# Altium PCB CANHub.PcbDoc
Units mm, origin at the board's own origin, x right, y up, seen from the top; angles counter-clockwise.
Board outline 91.44 x 12.83 mm, 2 copper layers (Top Layer, Bottom Layer); 16 components, 4 nets, 67 pads, 0 vias.
Unrouted connection lines stored in the file: 1.
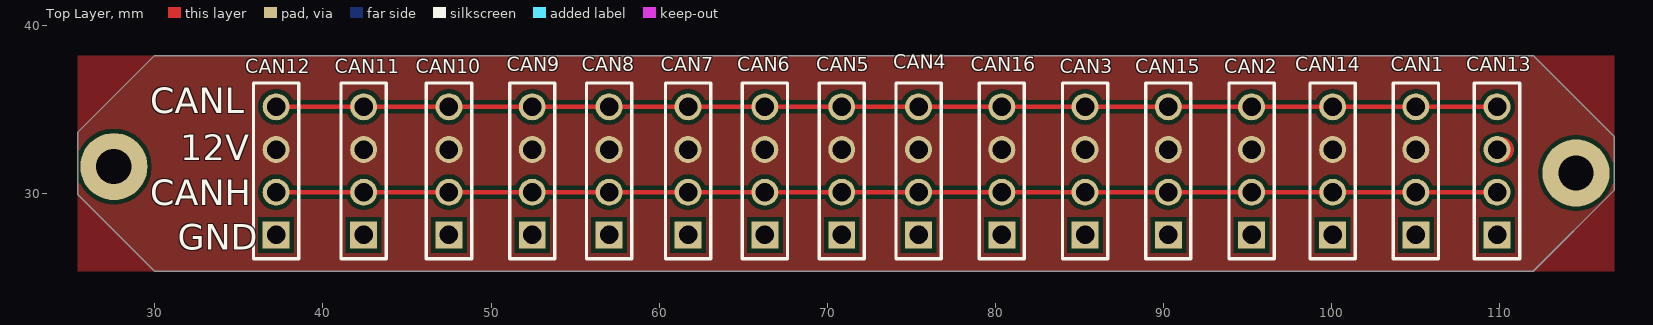
[diagram p0: Top Layer view]
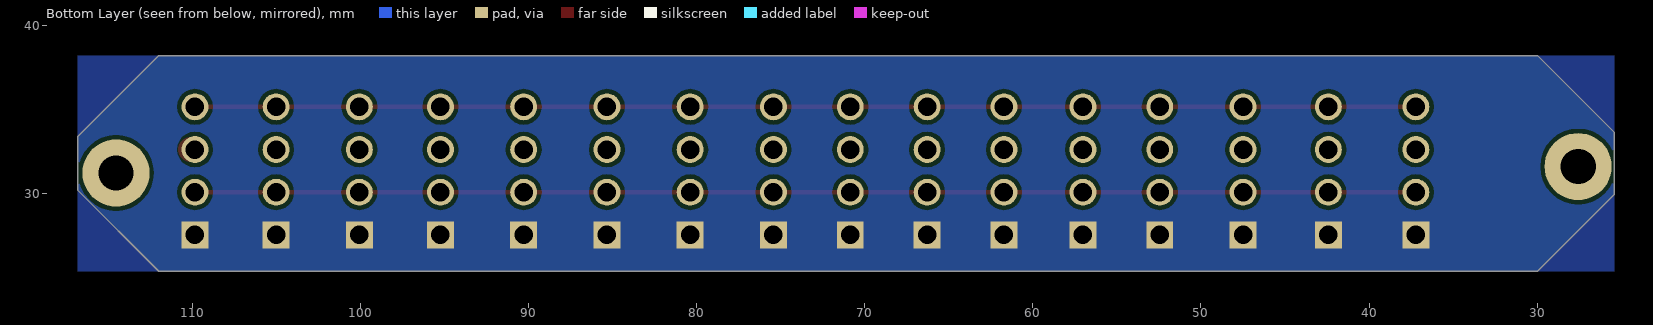
[diagram p1: Bottom Layer view, seen from below]
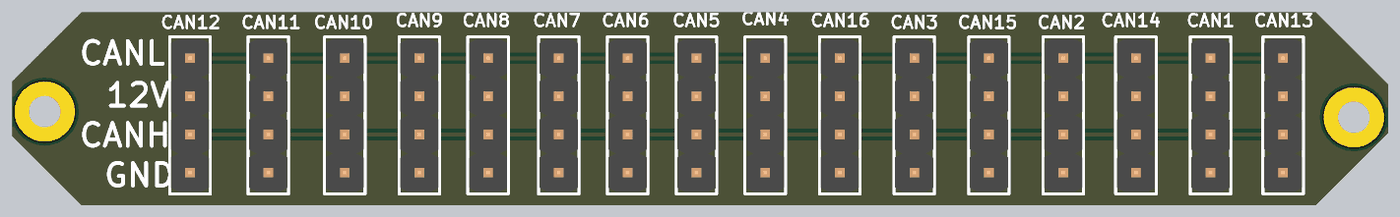
[diagram p2: 3D render of the assembled board from above, using the file's embedded part models]

## Layer stack, top to bottom
Top Solder: solder mask 0.0102, Solder Resist, Dk 3.5
Top Layer: signal copper 0.0356
Dielectric 1: dielectric 0.32, FR-4, Dk 4.8
Bottom Layer: signal copper 0.0356
Bottom Solder: solder mask 0.0102, Solder Resist, Dk 3.5

## Board outline
29.972,25.4 25.4,29.972 25.4,33.655 29.972,38.227 112.014,38.227 116.84,33.401 116.84,30.226 112.014,25.4

## Design rules (kind name [scope] priority, off if disabled: settings)
Clearance [All] p1: gap=0.254 ignorepadtopadclearanceinfootprint=FALSE except(0: Arc-Hole Track-Hole SMDPad-Hole THPad-Hole Via-Hole Fill-Hole Poly-Hole Region-Hole Text-Hole)
PolygonConnect PolygonConnect_2 [All vs IsNamedPolygon('GND_L02_P001')] p1: connectstyle=Direct reliefconductorwidth=0.254 reliefentries=4 polygonreliefangle="90 Angle" airgapwidth=0.254
PolygonConnect PolygonConnect_1 [All vs IsNamedPolygon('12V_L01_P000')] p2: connectstyle=Direct reliefconductorwidth=0.254 reliefentries=4 polygonreliefangle="90 Angle" airgapwidth=0.254
PolygonConnect [All] p3: connectstyle=Relief reliefconductorwidth=0.254 reliefentries=4 polygonreliefangle="90 Angle" airgapwidth=0.254
RoomDefinition CANHub [InComponentClass('CANHub')] p1: confinementstyle=ConfineIn formatcopy=TRUE lockcomponents=FALSE outline 25.273,19.558 112.141,19.558 112.141,38.1 25.273,38.1
RoutingVias [All] p1: holewidth=0.711 width=1.27 viastyle="Through Hole" minholewidth=0.711 minwidth=1.27 maxholewidth=0.711 maxwidth=1.27
SolderMaskExpansion [All] p1: expansion=0.102 istentingtop=FALSE
Width [All] p1: maxlimit=0.254 minlimit=0.254 preferedwidth=0.254
30 further rules are at their usual default settings.

## Components (designator, comment, footprint, x,y, rotation, side; value= is the part's Value field where it differs from the comment)
CAN1 "61300411121" 61300411121 105.029,31.369 r90 top
CAN2 "61300411121" 61300411121 95.25,31.369 r90 top
CAN3 "61300411121" 61300411121 85.344,31.369 r90 top
CAN4 "61300411121" 61300411121 75.438,31.369 r90 top
CAN5 "61300411121" 61300411121 70.866,31.369 r90 top
CAN6 "61300411121" 61300411121 66.294,31.369 r90 top
CAN7 "61300411121" 61300411121 61.722,31.369 r90 top
CAN8 "61300411121" 61300411121 57.023,31.369 r90 top
CAN9 "61300411121" 61300411121 52.451,31.369 r90 top
CAN10 "61300411121" 61300411121 47.498,31.369 r90 top
CAN11 "61300411121" 61300411121 42.418,31.369 r90 top
CAN12 "61300411121" 61300411121 37.211,31.369 r90 top
CAN13 "61300411121" 61300411121 109.855,31.369 r90 top
CAN14 "61300411121" 61300411121 100.076,31.369 r90 top
CAN15 "61300411121" 61300411121 90.297,31.369 r90 top
CAN16 "61300411121" 61300411121 80.391,31.369 r90 top

## Footprints (in the part's own frame and the unit in brackets; to place one, negate y for a bottom-side part, rotate by r counter-clockwise, add the part's x,y. Pads: shape width x height; smd on the part's side, far side on the other; paste and mask are expansions set on the pad)
61300411121 [mm] "Pin Header, pitch 2.54 mm, THT, Vertical, single row, 4p"
  rect 1.6x1.6 hole 1.1: 1(-3.81,0)
  round 1.6 hole 1.1: 2(-1.27,0) 3(1.27,0) 4(3.81,0)
  silkscreen extent -5.23,-1.35 5.23,1.35, body extent -5.08,-1.27 5.08,1.27, height 8.57

## Part data
CAN1 CAN2 CAN3 CAN4 CAN5 CAN6 CAN7 CAN8 CAN9 CAN10 CAN11 CAN12 CAN13 CAN14 CAN15 CAN16: library part CMP-1502-01064-1, "THT Vertical Pin Header WR-PHD, Pitch 2.54 mm, Single Row, 4 pins", Contact Resistance=20mOhm, Manufacturer="Wurth Elektronik", Operating Temperature=-40to105degC, Rated Current=3A, Withstanding Voltage=500VAC, Working Voltage=250VAC, Datasheet URL=https://katalog.we-online.de/em/datasheet/6130xx11121.pdf, Gender=Male, Manufacturer URL=http://www.we-online.de, Mounting Technology=THT, Orientation=Vertical, Package Reference=61300411121, Packaging=Bag, Part Number=61300411121, Pin Number=4, Pitch=2.54mm, Publisher=WurthElektronik, Row Number=Single

## Free pads (board coordinates)
  round 4 hole 2.1: 5(27.559,31.623) 5(36.068,-17.653) 5(114.554,31.242)

## Nets (pads, with @x,y where several pads share a name; then routed paths per layer and width w, separated by ;. In a path a pad name is that pad's centre, name@x,y a point inside that pad or via, vN(x,y) a via of type N, cw(c..) or ccw(c..) an arc to the next point about the centre after c; other vN are vias at no path point)
12V: CAN1.3 CAN2.3 CAN3.3 CAN4.3 CAN5.3 CAN6.3 CAN7.3 CAN8.3 CAN9.3 CAN10.3 CAN11.3 CAN12.3 CAN13.3 CAN14.3 CAN15.3 CAN16.3 | length 0.3
  Top Layer w1.5: CAN13.3 CAN13.3@110.109,32.639
CANH: CAN1.2 CAN2.2 CAN3.2 CAN4.2 CAN5.2 CAN6.2 CAN7.2 CAN8.2 CAN9.2 CAN10.2 CAN11.2 CAN12.2 CAN13.2 CAN14.2 CAN15.2 CAN16.2 | length 72.6
  Top Layer w0.254: CAN12.2 CAN11.2 CAN10.2 CAN9.2 CAN8.2 CAN7.2 CAN6.2 CAN5.2 CAN4.2 CAN16.2 CAN3.2 CAN15.2 CAN2.2 CAN14.2 CAN1.2 CAN13.2
CANL: CAN1.4 CAN2.4 CAN3.4 CAN4.4 CAN5.4 CAN6.4 CAN7.4 CAN8.4 CAN9.4 CAN10.4 CAN11.4 CAN12.4 CAN13.4 CAN14.4 CAN15.4 CAN16.4 | length 72.6
  Top Layer w0.254: CAN12.4 CAN11.4 CAN10.4 CAN9.4 CAN8.4 CAN7.4 CAN6.4 CAN5.4 CAN4.4 CAN16.4 CAN3.4 CAN15.4 CAN2.4 CAN14.4 CAN1.4 CAN13.4
GND: CAN1.1 CAN2.1 CAN3.1 CAN4.1 CAN5.1 CAN6.1 CAN7.1 CAN8.1 CAN9.1 CAN10.1 CAN11.1 CAN12.1 CAN13.1 CAN14.1 CAN15.1 CAN16.1

## Polygon pours and split planes (outlines as drawn)
12V on Top Layer "12V_L01_P000" (solid, pour order 0): 25.4,25.4 25.4,38.227 116.84,38.227 116.84,25.4
GND on Bottom Layer "GND_L02_P001" (solid, pour order 1): 25.4,25.4 25.4,38.227 116.84,38.227 116.84,25.4

## Silkscreen, mask and mechanical layers (free items; w line width, h text height)
Top Overlay:
  text "CANL" at 29.718,34.798 h1.52
  text "12V" at 31.496,32.004 h1.52
  text "CANH" at 29.718,29.337 h1.52
  text "GND" at 31.369,26.67 h1.52
Board Outline:
  lines w0.254: 29.972,25.4 112.014,25.4 ; 29.972,25.4 25.4,29.972 25.4,33.655 29.972,38.227 ; 29.972,25.4 29.972,38.227 ; 29.972,38.227 112.014,38.227 ; 112.014,25.4 116.84,30.226 116.84,33.401 112.014,38.227 ; 112.014,25.4 112.014,38.227